# EAGLE board untitled 2 (EAGLE 7.5.0)
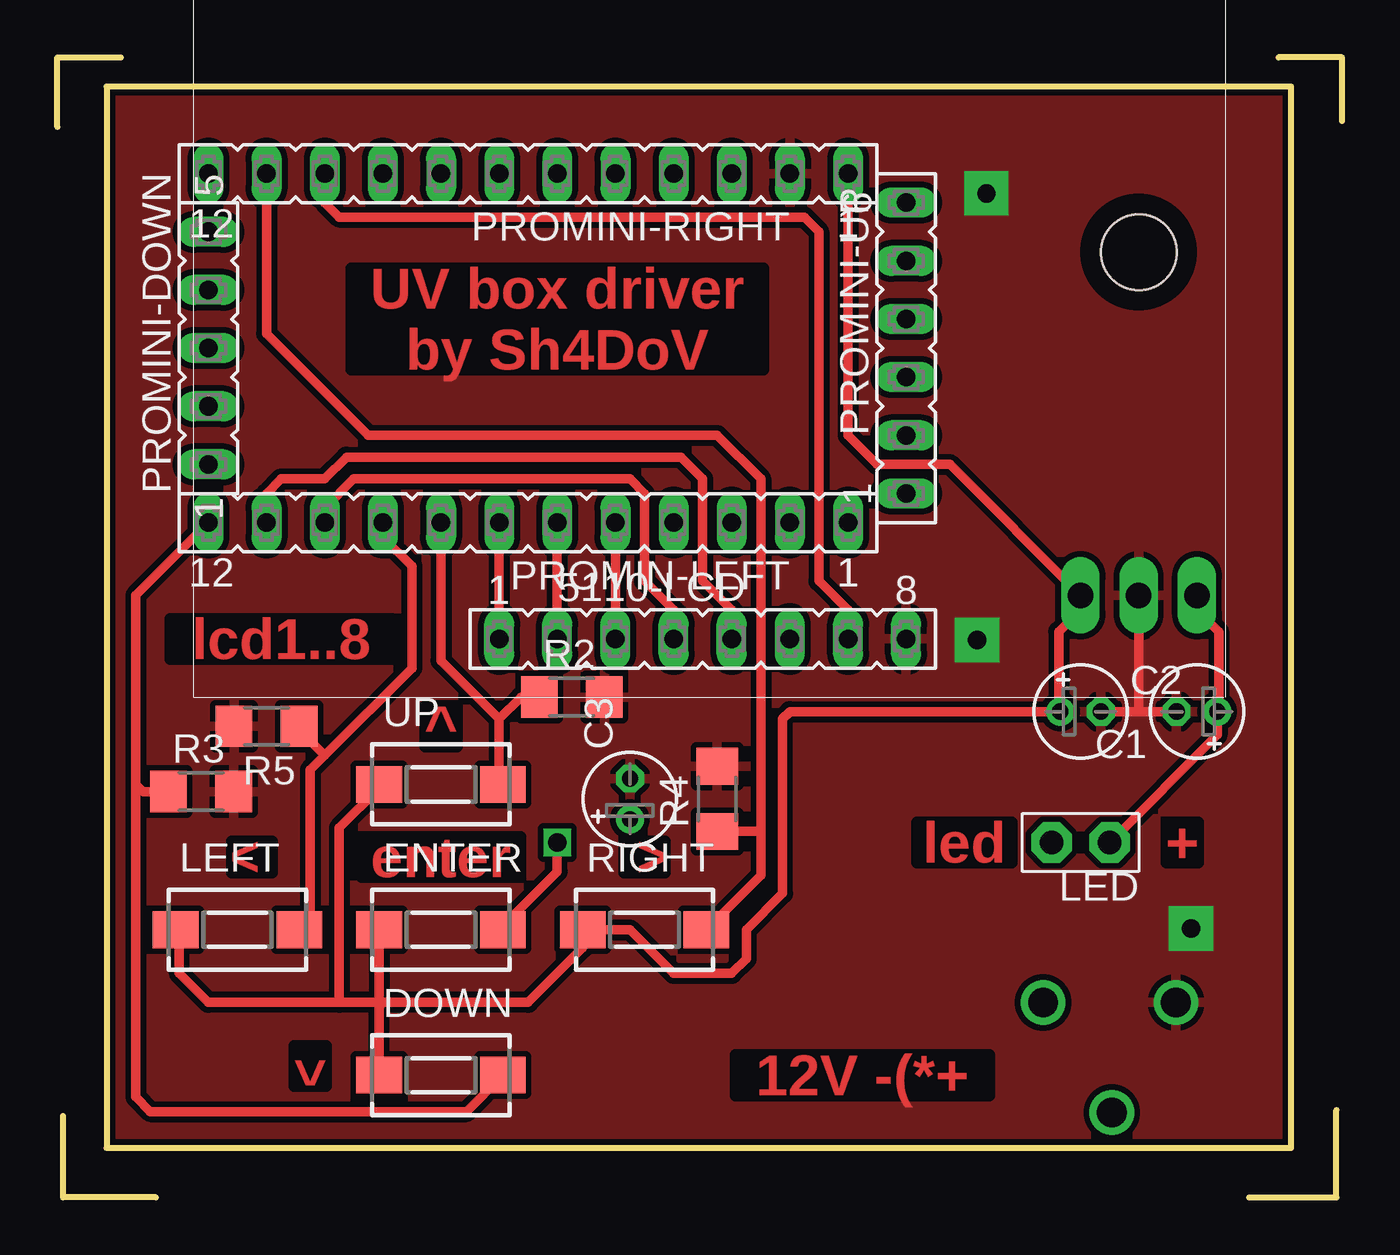
[diagram p0: board, top side]
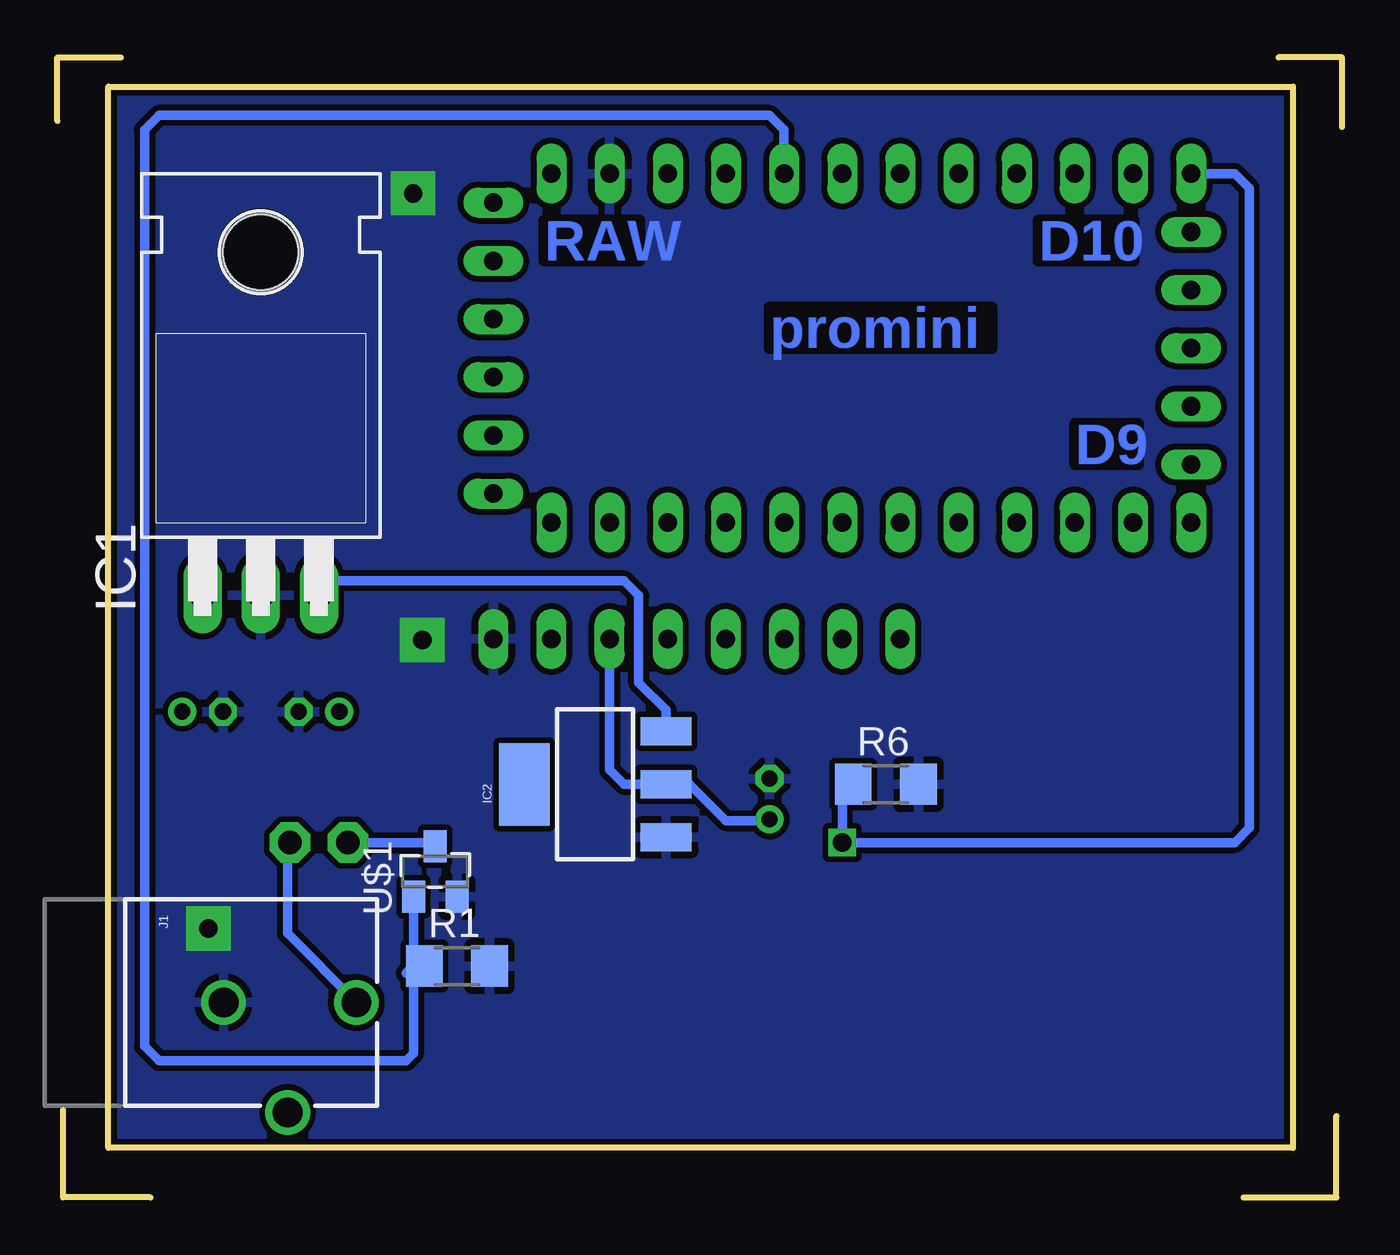
[diagram p1: board, bottom side, seen from below]

Size 56.13 x 49.78 mm. Coordinates in mm from the lower left corner, seen from the top.
Outline: 0,46.74 0,49.78 2.79,49.78
Outline: 56.13,46.99 56.13,49.78 53.34,49.78
Outline: 52.07,0 55.88,0 55.88,3.81
Outline: 4.32,0 0.25,0 0.25,3.56
Outline: 2.16,2.16 53.9,2.16 53.9,48.5 2.16,48.5 2.16,2.16
Copper layers (1*16): Top 0.035mm / dielectric 1.5mm / Bottom 0.035mm
Design rules "default 10mils": minimum track width 10mil, minimum drill 24mil, track to track 10mil, track to pad 10mil, pad to pad 10mil, via to via 10mil, smd to smd 10mil, copper to edge 10mil, drill to drill 10mil, minimum pad ring 10mil, minimum via ring 8mil, stop-mask expansion 4mil, vias tented up to drill 0mil, thermal gap 12mil
tRestrict: area 30,5.2 to 30.4,5.6

## Footprints (pad centres in the part's own frame; a part is rotated, then mirrored left to right if it is on the bottom)
FE08 = drill 0.813 long: 1 -8.89,0; 2 -6.35,0; 3 -3.81,0; 4 -1.27,0; 5 1.27,0; 6 3.81,0; 7 6.35,0; 8 8.89,0
E1,8-4 = drill 0.711 pad 1.168: + -0.889,0 | drill 0.711 pad 1.168 octagon: - 0.889,0
DTSM-3 = smd 2 x 1.6: 1 -2.7,0; 2 2.7,0
TO220H = drill 1.118 long: 1 -2.54,-10.16; 2 0,-10.16; 3 2.54,-10.16 | hole 3.302: 0,4.826
SOT223 = smd 1.219 x 2.235: 1 -2.311,-3.099; 2 0,-3.099; 3 2.311,-3.099 | smd 3.6 x 2.2: 4 0,3.099
POWER_JACK_PTH_BREAD = drill 1.3: GND 0,7.9; GNDBREAK 4.8,10.7; PWR 0,13.7
PIHEAD-1X2 = drill 1.016 pad 1.778 octagon: 1 -1.27,0; 2 1.27,0
FE12 = drill 0.813 long: 1 -13.97,0; 2 -11.43,0; 3 -8.89,0; 4 -6.35,0; 5 -3.81,0; 6 -1.27,0; 7 1.27,0; 8 3.81,0; 9 6.35,0; 10 8.89,0; 11 11.43,0; 12 13.97,0
FE05-1 = drill 0.813 long: 1 -5.08,0; 2 -2.54,0; 3 0,0; 4 2.54,0; 5 5.08,0
FE06 = drill 0.813 long: 1 -6.35,0; 2 -3.81,0; 3 -1.27,0; 4 1.27,0; 5 3.81,0; 6 6.35,0
R1206 = smd 1.6 x 1.803: 1 -1.422,0; 2 1.422,0
SOT-23 = smd 1 x 1.4: 1 -0.95,-1.1; 2 0.95,-1.1; 3 0,1.1

## Placement (x,y rotation side)
5110-LCD  [FE08]  28.19,24.38 0 top
C1  0.33uF  [E1,8-4]  49.78,21.21 180 top
C2  0.1uF  [E1,8-4]  44.7,21.21 0 top
C3  22uF  [E1,8-4]  25.02,17.4 90 top
DOWN  DTSM-3  [DTSM-3]  16.76,5.33 0 top
ENTER  DTSM-3  [DTSM-3]  16.76,11.68 0 top
IC1  7805T  [TO220H]  47.24,36.45 0 bottom
IC2  [SOT223]  32.64,18.03 90 bottom
J1  POWER_JACKPTH_BREAD  [POWER_JACK_PTH_BREAD]  56.77,8.51 270 bottom
LED  PINHEAD-1X2  [PIHEAD-1X2]  44.7,15.49 180 top
LEFT  DTSM-3  [DTSM-3]  7.87,11.68 0 top
PROMIN-LEFT  [FE12]  20.57,29.46 180 top
PROMINI-DOWN  [FE05-1]  6.6,37.08 90 top
PROMINI-RIGHT  [FE12]  20.57,44.7 180 top
PROMINI-UP  [FE06]  37.08,37.08 90 top
R1  1k  [R1206]  38.67,10.1 0 bottom
R2  10k  [R1206]  22.48,21.84 0 top
R3  10k  [R1206]  6.29,17.72 0 top
R4  10k  [R1206]  28.83,17.4 90 top
R5  10k  [R1206]  9.14,20.57 180 top
R6  10k  [R1206]  19.94,18.03 0 bottom
RIGHT  DTSM-3  [DTSM-3]  25.65,11.68 0 top
U$1  AO3400A  [SOT-23]  39.62,14.22 0 bottom
UP  DTSM-3  [DTSM-3]  16.76,18.03 0 top

## Library data of the parts
5110-LCD PROMIN-LEFT PROMINI-DOWN PROMINI-RIGHT PROMINI-UP = con-lsta; OC_FARNELL: unknown; OC_NEWARK: unknown
C1-C3 R1-R6 = resistor
DOWN ENTER LEFT RIGHT UP = switch-tact
IC1 = linear
IC2 = SparkFun-PowerIC; PROD_ID: VREG-08170
J1 = SparkFun-Connectors; PROD_ID: PRT-10811
LED = mcp73831
U$1 = smd-footprints

## Nets
BL: 5110-LCD.7 PROMINI-RIGHT.10
CE: 5110-LCD.2 PROMIN-LEFT.6
CLK: 5110-LCD.5 PROMIN-LEFT.11
DC: 5110-LCD.3 PROMIN-LEFT.5
DIN: 5110-LCD.4 PROMIN-LEFT.10
DOWN: DOWN.2 PROMIN-LEFT.12 R3.1
ENTER: ENTER.2 PROMINI-RIGHT.12 R6.1
GND: 5110-LCD.8 C1.- C2.- C3.- IC1.2 IC2.1 J1.GND PROMINI-RIGHT.2 R1.2 R2.2 R3.2 R4.2 R5.2 R6.2 U$1.2
LED-CONTROL: LED.2 U$1.3
LED_ON: PROMINI-RIGHT.5 R1.1 U$1.1
LEFT: LEFT.2 PROMIN-LEFT.9 R5.1
RIGHT: PROMINI-RIGHT.11 R4.1 RIGHT.2
RST: 5110-LCD.1 PROMIN-LEFT.7
UP: PROMIN-LEFT.8 R2.1 UP.2
VCC3.3V: 5110-LCD.6 C3.+ IC2.2
VCC5V: C2.+ DOWN.1 ENTER.1 IC1.3 IC2.3 LEFT.1 PROMINI-RIGHT.1 RIGHT.1 UP.1
VCC12V: C1.+ IC1.1 J1.PWR LED.1

## Tracks (layer width: path | path; a pad name or v marks a point on that pad's centre or on a via)
BL
  Top 0.406: PROMINI-RIGHT.10 11.68,43.43 12.32,42.8 32.64,42.8 33.27,42.16 33.27,26.92 34.54,25.65 5110-LCD.7
CE
  Top 0.406: PROMIN-LEFT.6 5110-LCD.2
CLK
  Top 0.406: PROMIN-LEFT.11 9.14,30.73 9.78,31.37 11.68,31.37 12.64,32.32 27.24,32.32 28.19,31.37 28.19,26.92 29.46,25.65 5110-LCD.5
DC
  Top 0.406: PROMIN-LEFT.5 5110-LCD.3
DIN
  Top 0.406: PROMIN-LEFT.10 11.68,30.1 12.95,31.37 25.02,31.37 25.65,30.73 25.65,26.92 26.92,25.65 5110-LCD.4
DOWN
  Top 0.406: PROMIN-LEFT.12 3.43,26.29 3.43,18.03 | 3.43,18.03 3.43,4.38 4.06,3.75 17.88,3.75 DOWN.2 | R3.1 3.75,17.72 3.43,18.03
ENTER  (via drill 0.8)
  Top 0.406: ENTER.2 19.46,11.84 21.84,14.22 v21.84,15.49
  Bottom 0.406: PROMINI-RIGHT.12 4.7,44.7 4.06,44.07 4.06,16.13 4.7,15.49 v21.84,15.49 21.84,17.55 R6.1
GND  (via drill 0.8 pad 1.93)
  Top 0.406: C1.- 47.24,21.21 | 47.24,21.21 C2.- | IC1.2 47.24,21.21
  other vias: 49.53,11.73 40.18,24.33 40.59,43.84
  pour Top: 2.01,48.77 53.8,48.36 54.2,1.55 1.6,1.55
  pour Bottom: 53.87,48.41 1.75,48.82 1.52,2.16 54.23,2.16
LED-CONTROL
  Bottom 0.406: LED.2 39.79,15.49 U$1.3
LED_ON
  Bottom 0.406: R1.1 40.41,9.78 40.89,9.78 40.57,10.1 U$1.1 40.57,6.29 40.89,5.97 51.69,5.97 52.32,6.6 52.32,46.61 51.69,47.24 25.02,47.24 24.38,46.61 PROMINI-RIGHT.5
LEFT
  Top 0.406: 11.68,19.3 15.49,23.11 15.49,27.56 14.22,28.83 PROMIN-LEFT.9 | 11.68,19.3 11.05,18.67 11.05,12.16 LEFT.2 | R5.1 10.57,20.42 11.68,19.3
N$1
  pour Top: 2.16,48.51 52.96,48.51 52.96,2.79 2.16,3.43
RIGHT
  Top 0.406: PROMINI-RIGHT.11 9.14,37.72 13.59,33.27 28.83,33.27 30.73,31.37 30.73,16.13 | 30.73,16.13 30.73,14.06 RIGHT.2 | R4.1 30.58,15.98 30.73,16.13
RST
  Top 0.406: PROMIN-LEFT.7 5110-LCD.1
UP
  Top 0.406: PROMIN-LEFT.8 16.76,23.43 19.3,20.89 | 19.3,20.89 19.3,18.19 UP.2 | R2.1 20.26,21.84 19.3,20.89
VCC3.3V
  Bottom 0.406: 5110-LCD.6 32,18.67 31.37,18.03 IC2.2 28.51,18.03 26.92,16.45 25.08,16.45 C3.+
VCC5V
  Top 0.406: 14.22,8.51 20.57,8.51 22.95,10.89 RIGHT.1 25.02,11.68 26.92,9.78 29.46,9.78 30.1,10.41 30.1,11.68 31.69,13.27 31.69,20.89 32,21.21 C2.+ 43.75,21.27 43.75,24.7 44.7,25.65 IC1.3 38.99,32 35.81,32 34.54,33.27 PROMINI-RIGHT.1 | 14.22,8.51 12.32,8.51 | 12.32,8.51 6.6,8.51 5.33,9.78 5.33,11.52 LEFT.1 | ENTER.1 14.06,8.67 14.22,8.51 | UP.1 14.06,17.87 12.32,16.13 12.32,8.51 | DOWN.1 14.06,8.35 14.22,8.51
  Bottom 0.406: IC2.3 29.54,21.29 30.73,22.48 30.73,26.29 31.37,26.92 44.07,26.92 IC1.3
VCC12V
  Top 0.406: IC1.1 49.78,25.65 50.74,24.7 50.74,21.27 C1.+ 50.67,20.19 LED.1
  Bottom 0.406: J1.PWR 43.07,8.53 46.08,11.53 46.08,15.39 LED.1

## Text on the board
Top: UV box driver / by Sh4DoV | lcd1..8 | ^ | led | + | ^ | enter | ^ | ^ | 12V -(*+
Bottom: D10 | RAW | promini | D9